# EAGLE board TeamE (EAGLE 6.5.0)
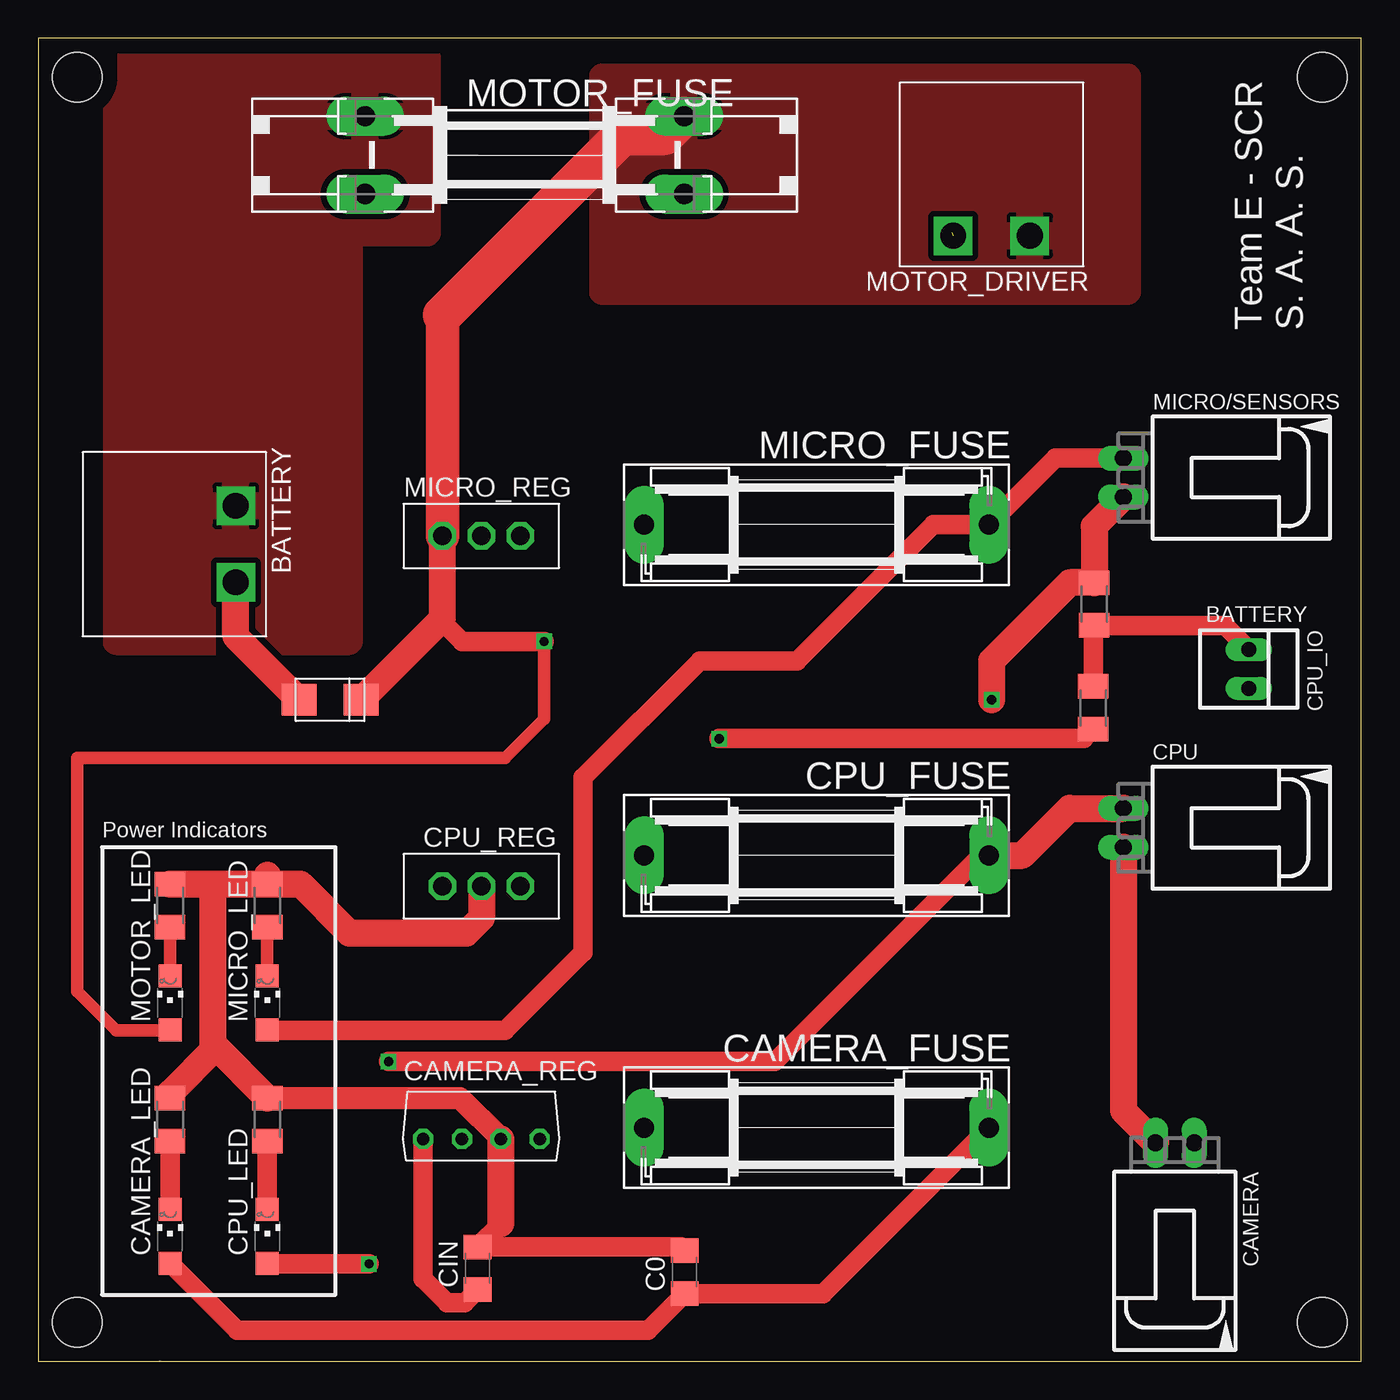
[diagram p0: board, top side]
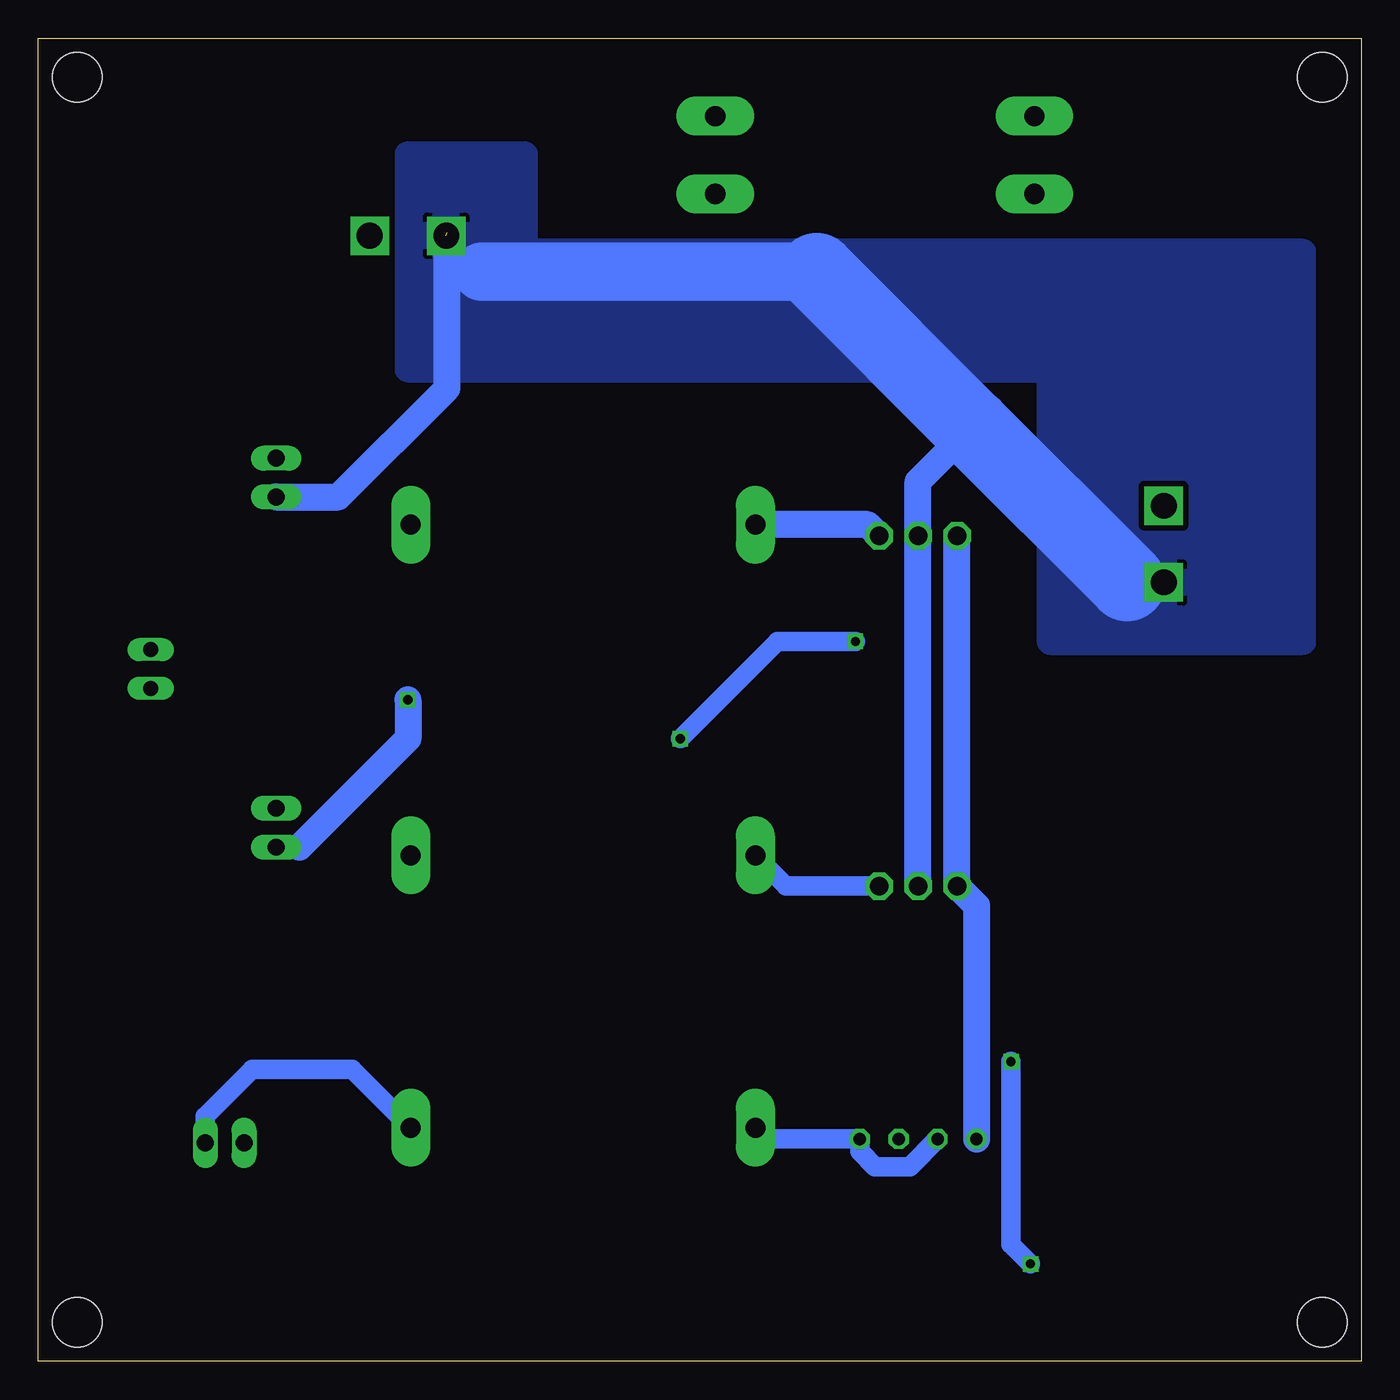
[diagram p1: board, bottom side, seen from below]

Size 86.36 x 86.36 mm. Coordinates in mm from the lower left corner, seen from the top.
Outline: 0,0 86.36,0 86.36,86.36 0,86.36 0,0
Copper layers (1*16): Top 0.035mm / dielectric 1.5mm / Bottom 0.035mm
Design rules "default *": minimum track width 5mil, minimum drill 10mil, track to track 15mil, track to pad 15mil, pad to pad 15mil, via to via 15mil, smd to smd 15mil, copper to edge 40mil, drill to drill 8mil, minimum pad ring 10mil, minimum via ring 8mil, stop-mask expansion 4mil, vias tented up to drill 0mil, thermal gap 10mil
Holes 3.2 mm at 2.54,2.54 83.82,2.54 83.82,83.82 2.54,83.82

## Footprints (pad centres in the part's own frame; a part is rotated, then mirrored left to right if it is on the bottom)
TERM-BLOCK = drill 1.676 square: MINUS 2.5,4; PLUS -2.5,4
C1206 = smd 1.6 x 1.8: 1 -1.4,0; 2 1.4,0
70553-02 = drill 1.092 long: 1 -1.27,-7.62; 2 1.27,-7.62
SH22,5 = drill 1.321 pad 2.54 long: 1 -11.252,0; 2 11.252,0
CHIPLED_1206 = smd 1.5 x 1.5: A 0,-1.75; C 0,1.75
PQ05RD21 = drill 0.8 octagon: GND 1.27,0; ON/OFF 3.81,0; VIN -3.81,0; VOUT -1.27,0
22-23-2021 = drill 1 long: 1 -1.27,0; 2 1.27,0
TO-220 = drill 1.2 octagon: GND 0,0; INPUT -2.54,0; OUTPUT 2.54,0
SHKOG = drill 1.321 pad 2.54 long: 1A -10.414,2.54; 1B -10.414,-2.54; 2A 10.414,2.54; 2B 10.414,-2.54
M1206 = smd 1.6 x 2: 1 -1.4,0; 2 1.4,0
SMA = smd 2.286 x 2.032: ANNODE -2.032,0; CATHODE 2.032,0

## Placement (x,y rotation side)
BATTERY  TERMINAL-BLOCK  [TERM-BLOCK]  8.89,53.34 270 top
C0  47 uF  [C1206]  42.2,5.82 90 top
CAMERA  C-GRID-02-70553  [70553-02]  74.19,6.64 180 top
CAMERA_FUSE  2.5A  [SH22,5]  50.8,15.24 180 top
CAMERA_LED  GREEN  [CHIPLED_1206]  8.6,8.15 0 top
CAMERA_REG  12V-REGULATOR-2A  [PQ05RD21]  28.92,14.5 0 top
CIN  33 uF  [C1206]  28.68,6.06 90 top
CPU  C-GRID-02-70553  [70553-02]  78.45,34.82 270 top
CPU_FUSE  1.5A  [SH22,5]  50.8,33.02 180 top
CPU_IO  22-23-2021  [22-23-2021]  79.03,45.19 270 top
CPU_LED  YELLOW  [CHIPLED_1206]  14.95,8.15 0 top
CPU_REG  5V-REGULATOR-1.5A  [TO-220]  28.92,31.01 0 top
MICRO/SENSORS  C-GRID-02-70553  [70553-02]  78.45,57.68 270 top
MICRO_FUSE  1.5A  [SH22,5]  50.8,54.61 180 top
MICRO_LED  RED  [CHIPLED_1206]  14.95,23.39 0 top
MICRO_REG  8V-REGULATOR-1.5A  [TO-220]  28.92,53.87 0 top
MOTOR_DRIVER  TERMINAL-BLOCK  [TERM-BLOCK]  62.23,77.47 180 top
MOTOR_FUSE  16A  [SHKOG]  31.75,78.74 0 top
MOTOR_LED  BLUE  [CHIPLED_1206]  8.6,23.39 0 top
R1  1k  [M1206]  8.6,15.77 90 top
R2  500  [M1206]  14.95,29.74 90 top
R3  500  [M1206]  14.95,15.77 90 top
R4  2k  [M1206]  8.6,29.74 270 top
R5  4.2k  [M1206]  68.87,42.65 90 top
R6  2k  [M1206]  68.93,49.43 90 top
SYS_DIODE  17V-TVS-B  [SMA]  19.05,43.18 180 top

## Library data of the parts
BATTERY CAMERA_REG CPU_REG MICRO_REG MOTOR_DRIVER SYS_DIODE = task10
C0 CIN R1-R6 = rcl
CAMERA CPU MICRO/SENSORS = con-molex; OC_FARNELL: unknown; OC_NEWARK: unknown
CAMERA_FUSE CPU_FUSE MICRO_FUSE = fuse; MF: SCHURTER; MPN: 0031.8201; OC_FARNELL: 1162740; OC_NEWARK: 96F8317
CAMERA_LED CPU_LED MICRO_LED MOTOR_LED = led
CPU_IO = con-molex; MF: MOLEX; MPN: 22-23-2021; OC_FARNELL: 1462926; OC_NEWARK: 25C3832
MOTOR_FUSE = fuse; OC_FARNELL: unknown; OC_NEWARK: unknown

## Nets
GND: BATTERY.MINUS C0.2 CAMERA.2 CAMERA_REG.GND CIN.2 CPU.2 CPU_REG.GND MICRO/SENSORS.2 MICRO_REG.GND MOTOR_DRIVER.MINUS R1.2 R2.2 R3.2 R4.1 R6.2 SYS_DIODE.CATHODE
N$1: CPU_IO.1 R5.2 R6.1
N$2: CAMERA_LED.C R1.1
N$3: MICRO_LED.C R2.1
N$4: CPU_LED.C R3.1
N$5: MOTOR_LED.C R4.2
N$7: CPU_FUSE.2 CPU_REG.OUTPUT
N$8: CPU.1 CPU_FUSE.1 CPU_LED.A
N$9: MICRO_FUSE.2 MICRO_REG.OUTPUT
N$10: MICRO/SENSORS.1 MICRO_FUSE.1 MICRO_LED.A
N$11: C0.1 CAMERA.1 CAMERA_FUSE.1 CAMERA_LED.A
N$12: CAMERA_FUSE.2 CAMERA_REG.ON/OFF CAMERA_REG.VOUT
VBATT: BATTERY.PLUS MOTOR_FUSE.1A
VCC: CAMERA_REG.VIN CIN.1 CPU_REG.INPUT MICRO_REG.INPUT MOTOR_DRIVER.PLUS MOTOR_FUSE.2A MOTOR_LED.A R5.1 SYS_DIODE.ANNODE

## Tracks (layer width: path | path; a pad name or v marks a point on that pad's centre or on a via)
GND  (via drill 0.6)  (1 unrouted)
  Top 1.27: 62.23,44.13 v62.23,43.18 | 11.62,20.51 11.43,20.7 | R1.2 8.6,17.49 | C0.2 41.95,7.46 CIN.2 30.19,8.98
  Top 1.422: CAMERA_REG.GND 27.52,17.17 R3.2
  Top 1.778: R4.1 11.43,31.14 | 11.43,31.14 R2.2 | R2.2 14.95,31.73 | MICRO/SENSORS.2 68.93,54.51 R6.2 67.34,50.83 62.23,45.72 v62.23,43.18 | R3.2 11.62,20.51 8.6,17.49 | 11.43,20.7 11.43,31.14 | R2.2 17.12,31.14 20.32,27.94 27.94,27.94 28.92,28.92 CPU_REG.GND | 30.19,8.98 CAMERA_REG.GND | SYS_DIODE.CATHODE 12.89,47.31 BATTERY.MINUS | CPU.2 70.83,16.34 CAMERA.2
  Bottom 1.27: 69.32,33.55 CPU.2
  Bottom 1.778: 20.32,55.88 15.28,50.84 | MICRO/SENSORS.2 66.78,56.41 59.69,63.5 59.69,73.66 | v62.23,43.18 62.23,40.64 69.32,33.55 | CPU_REG.GND MICRO_REG.GND 28.92,57.44 25.4,60.96
  Bottom 3.81: 57.38,71.12 35.56,71.12
  Bottom 5.08: 35.56,71.12 25.4,60.96 15.28,50.84
  pour Bottom: 3.81,72.39 54.61,72.39 54.61,74.93 54.61,78.74 62.23,78.74 62.23,64.77 20.32,64.77 20.32,46.99 3.81,46.99
N$1
  Top 1.27: R5.2 68.87,47.97 R6.1 77.45,48.03 CPU_IO.1
N$2
  Top 1.27: CAMERA_LED.C R1.1
N$3
  Top 0.813: MICRO_LED.C R2.1
N$4
  Top 1.27: CPU_LED.C R3.1
N$5
  Top 0.813: MOTOR_LED.C R4.2
N$7
  Bottom 1.27: CPU_REG.OUTPUT 37.54,31.01 CPU_FUSE.2
N$8  (via drill 0.6)
  Top 1.27: 67.08,36.09 67.31,36.09 | v21.59,6.35 15.01,6.35 CPU_LED.A | v22.86,19.56 48.08,19.56 61.54,33.02 CPU_FUSE.1
  Top 1.778: CPU.1 67.31,36.09 64.24,33.02 CPU_FUSE.1
  Bottom 1.27: v22.86,19.56 22.86,7.62 v21.59,6.35
N$9
  Bottom 1.778: MICRO_REG.OUTPUT 32.2,54.61 MICRO_FUSE.2
N$10
  Top 1.27: MICRO/SENSORS.1 66.4,58.95 MICRO_FUSE.1 58.42,54.61 49.53,45.72 43.18,45.72 35.56,38.1 35.56,26.67 30.48,21.59 15.01,21.59 MICRO_LED.A
N$11
  Top 1.27: CAMERA_LED.A 12.98,2.03 39.81,2.03 C0.1 51.23,4.42 CAMERA_FUSE.1
  Bottom 1.27: CAMERA_FUSE.1 65.86,19.05 72.39,19.05 75.46,15.98 CAMERA.1
N$12
  Bottom 1.27: CAMERA_REG.VOUT 29.46,12.7 31.75,12.7 32.73,13.68 CAMERA_REG.ON/OFF 38.81,14.5 CAMERA_FUSE.2
VBATT
  pour Top: 5.08,85.09 5.08,46.99 20.32,46.99 20.32,73.66 25.4,73.66 25.4,85.09
VCC  (via drill 0.6)
  Top 0.813: MOTOR_LED.A 8.55,21.59 5.08,21.59 2.54,24.13 2.54,39.37 30.48,39.37 33.02,41.91 v33.02,46.99 | R5.1 68.26,40.64
  Top 1.27: 68.26,40.64 v44.45,40.64 | v33.02,46.99 27.65,46.99 26.38,48.26 26.38,53.34 MICRO_REG.INPUT | CAMERA_REG.VIN 25.11,5.37 26.67,3.81 27.82,3.81 CIN.1
  Top 1.778: SYS_DIODE.ANNODE 26.38,48.48 26.38,53.34
  Top 2.184: MICRO_REG.INPUT 26.38,68.29
  Top 2.54: 26.38,68.29 38.1,80.01 40.89,80.01 MOTOR_FUSE.2A
  Bottom 1.27: v44.45,40.64 38.1,46.99 v33.02,46.99
  Bottom 1.778: CAMERA_REG.VIN 25.11,29.74 CPU_REG.INPUT MICRO_REG.INPUT
  pour Top: 36.83,83.82 36.83,69.85 71.12,69.85 71.12,83.82

## Text on the board
tPlace: Team E - SCR / S. A. A. S. | BATTERY | /Users/alex/Desktop/TeamE_Task10/emu.bmp
tNames: Power Indicators